# Altium PCB SevenSegment.PcbDoc
Units mm, origin at the board's own origin, x right, y up, seen from the top; angles counter-clockwise.
Board outline 50 x 35 mm, 2 copper layers (Top Layer, Bottom Layer); 50 components, 54 nets, 134 pads, 0 vias.
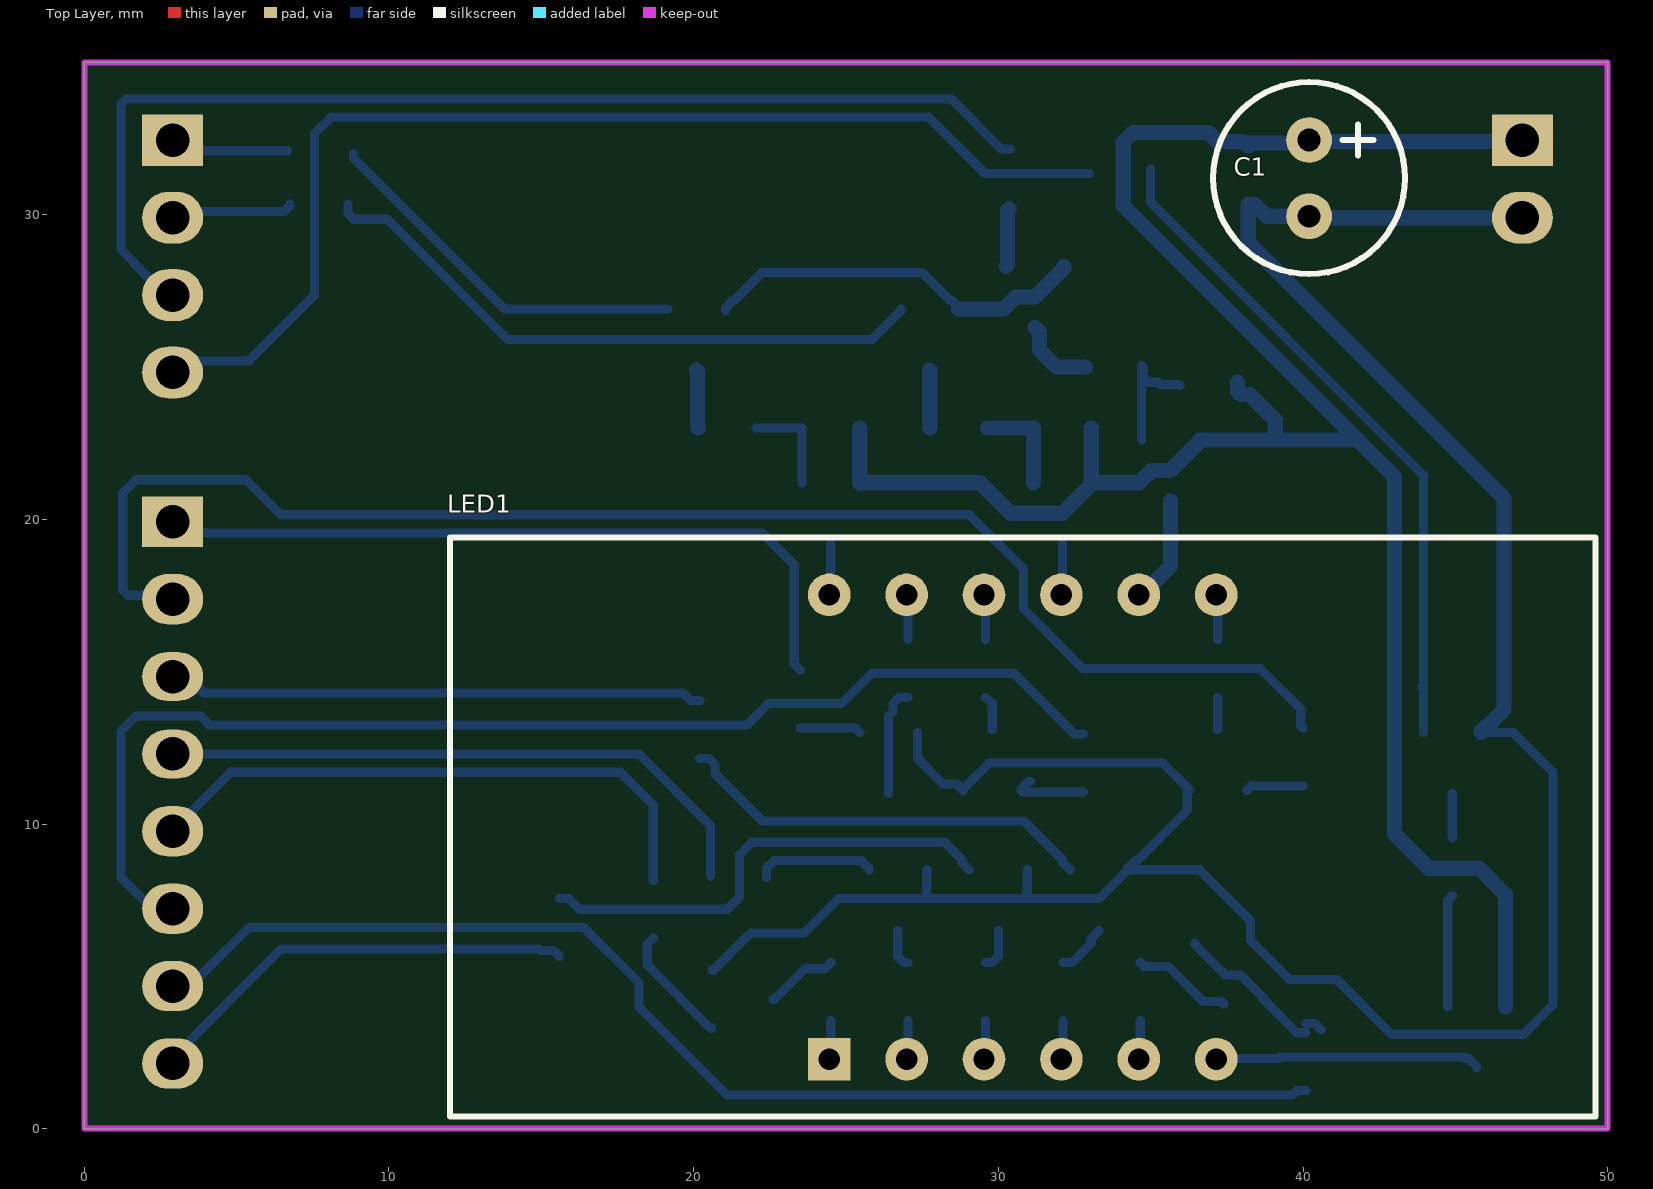
[diagram p0: Top Layer view]
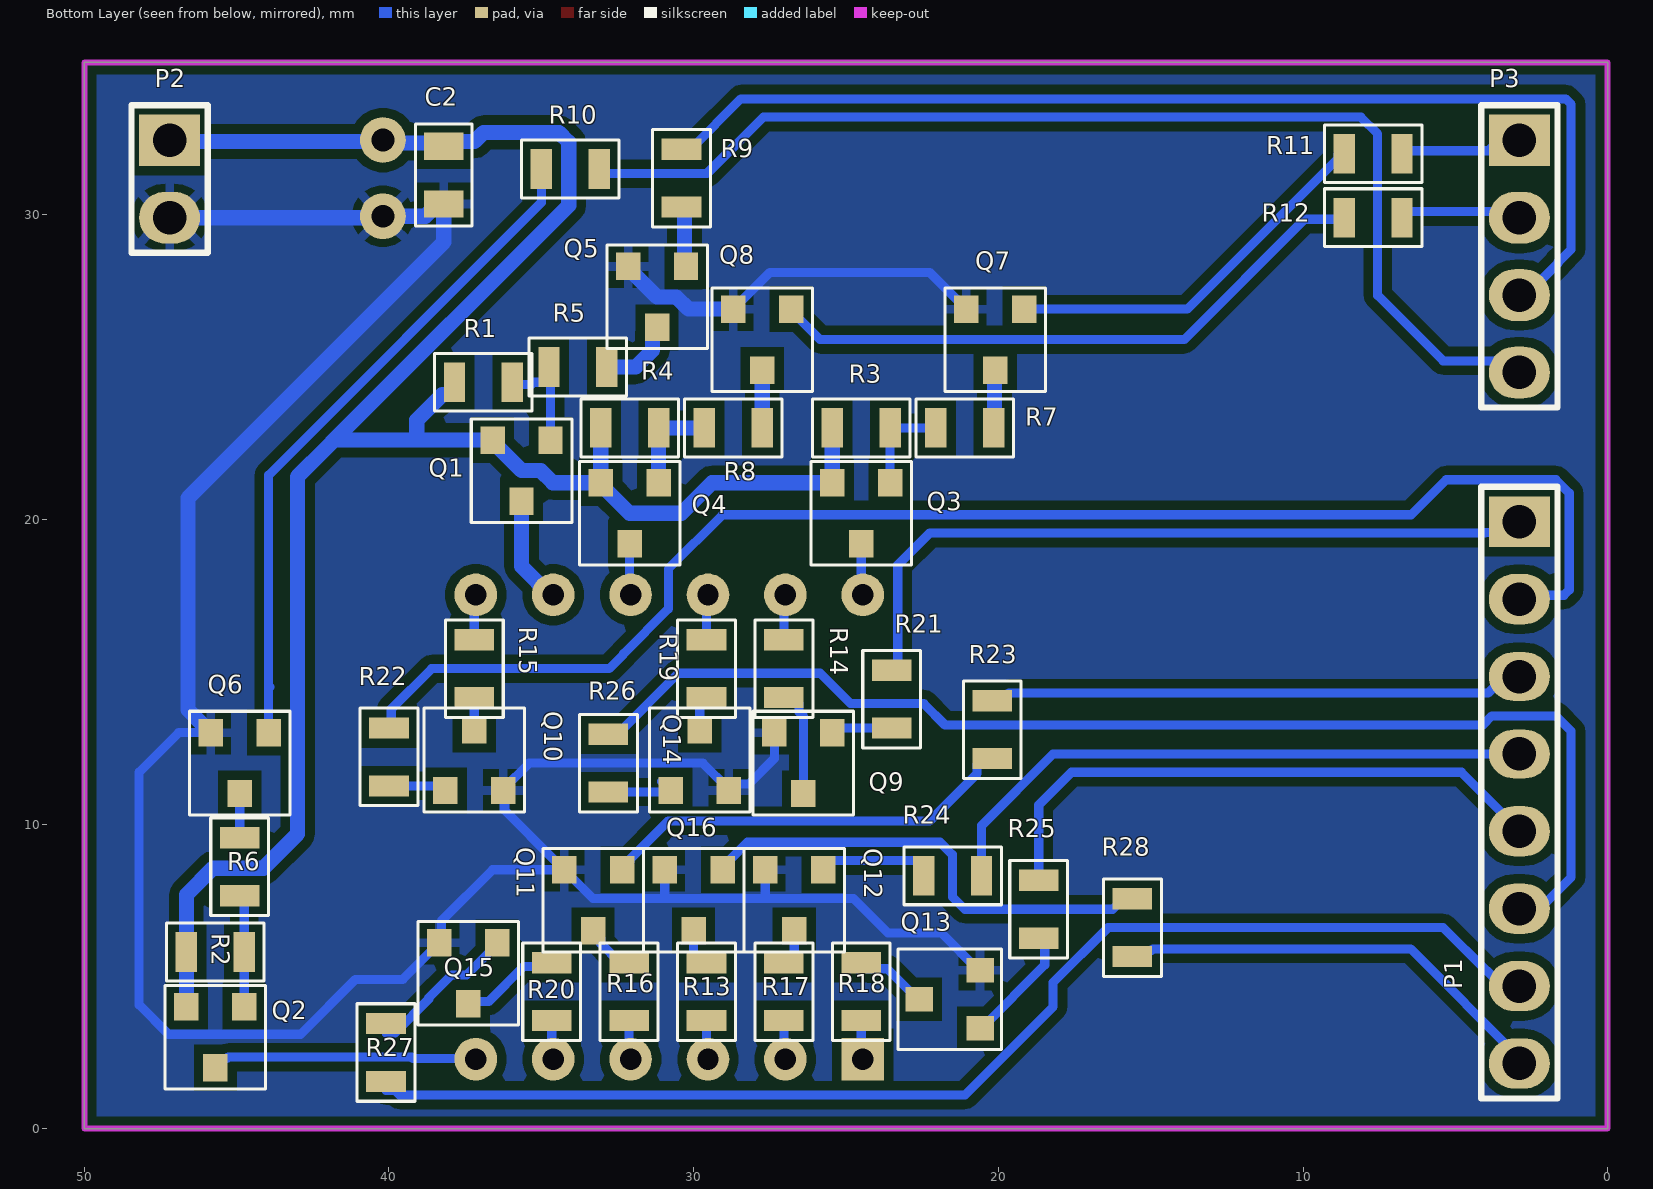
[diagram p1: Bottom Layer view, seen from below]
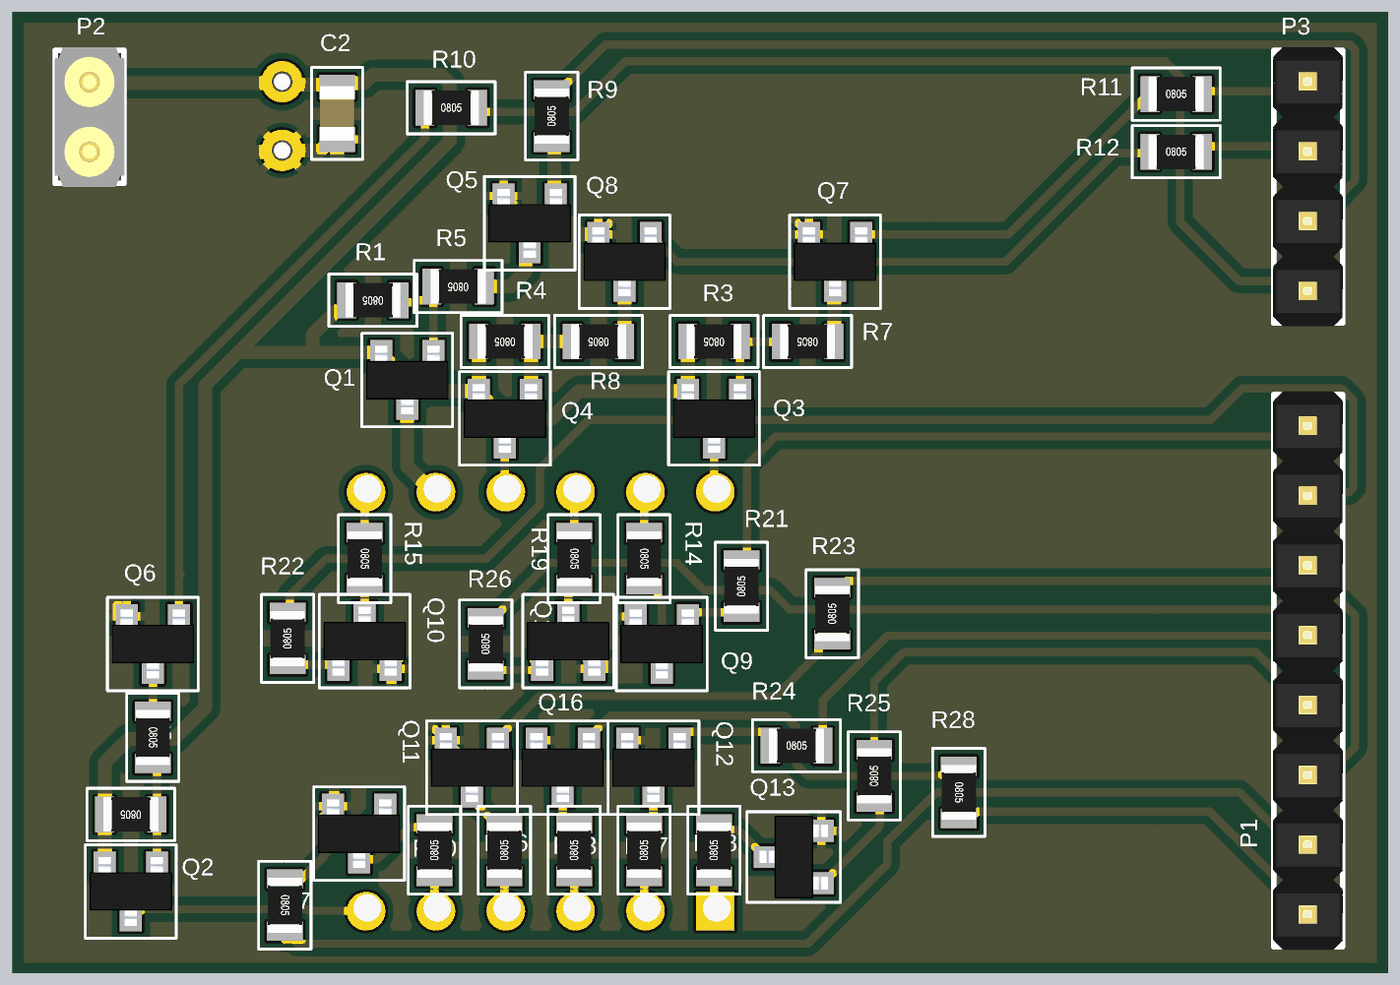
[diagram p2: 3D render of the assembled board from below, using the file's embedded part models]

## Layer stack, top to bottom
Top Solder: solder mask 0.0102, Solder Resist, Dk 3.5
Top Layer: signal copper 0.0356
Dielectric 1: dielectric 0.32, FR-4, Dk 4.8
Bottom Layer: signal copper 0.0356
Bottom Solder: solder mask 0.0102, Solder Resist, Dk 3.5

## Board outline
0,0 0,35 50,35 50,0

## Design rules (kind name [scope] priority, off if disabled: settings)
Clearance [All] p1: gap=0.3 ignorepadtopadclearanceinfootprint=FALSE
HoleSize [All] p1: absolutevalues=TRUE maxlimit=4 minlimit=0.025 maxpercent=80.000 minpercent=20.000
MinimumAnnularRing [All] p1: minimumring=0.2
PolygonConnect [All] p1: connectstyle=Relief reliefconductorwidth=0.3 reliefentries=4 polygonreliefangle="90 Angle" conductorbypadedge=TRUE mindistance=0.381 enablemindistance=FALSE airgapwidth=0.254
RoutingLayers [All] p1: top layer_v5=FALSE bottom layer_v5=TRUE
RoutingVias [All] p1: holewidth=0.711 width=1.27 viastyle="Through Hole" minholewidth=0.3 minwidth=0.8 maxholewidth=0.711 maxwidth=1.27
SolderMaskExpansion [All] p1: expansion=0.102 istentingtop=FALSE
SupplyNets "Schematic Supply Nets_1" [InNet('GND')] p1: voltage=0.000
SupplyNets "Schematic Supply Nets" [InNet('VCC')] p2: voltage=0.000
UnRoutedNet [All] p1: checkbadconnections=TRUE
Width [All] p1: maxlimit=0.5 minlimit=0.2 preferedwidth=0.254 minimp=50.000000 maximp=50.000000 favimp=50.000000
27 further rules are at their usual default settings.

## Components (designator, comment, footprint, x,y, rotation, side; value= is the part's Value field where it differs from the comment)
C1 "100uF/25V" 100UF/25V 40.2,31.2 r270 top
C2 "100nF/50V/0805" "CAPACITOR 0805" 38.2,31.3 r90 bottom
LED1 "sevensegment-3 or 4 digit" 5631BS-7SEG 30.8,9.9 r0 top
P1 "XH_8PIN" "PIN-HEADER 8*1" 2.9,11.03 r270 bottom
P2 "XH_2PIN" "pin-header 2*1" 47.2,31.17 r270 bottom
P3 "XH_4PIN" "PIN-HEADER 4*1" 2.9,28.63 r270 bottom
Q1 "BC807-40" SOT23 35.65,21.6 r0 bottom
Q2 "BC807-40" SOT23 45.7,3 r0 bottom
Q3 "BC807-40" SOT23 24.5,20.2 r0 bottom
Q4 "BC807-40" SOT23 32.1,20.2 r0 bottom
Q5 "BC847B" SOT23 31.2,27.3 r0 bottom
Q6 "BC847B" SOT23 44.9,12 r0 bottom
Q7 "BC847B" SOT23 20.1,25.9 r0 bottom
Q8 "BC847B" SOT23 27.75,25.9 r0 bottom
Q9 "BC847B" SOT23 26.4,12 r0 bottom
Q10 "BC847B" SOT23 37.2,12.1 r180 bottom
Q11 "BC847B" SOT23 33.3,7.5 r0 bottom
Q12 "BC847B" SOT23 26.7,7.5 r0 bottom
Q13 "BC847B" SOT23 21.6,4.25 r90 bottom
Q14 "BC847B" SOT23 29.8,12.1 r180 bottom
Q15 "BC847B" SOT23 37.4,5.1 r0 bottom
Q16 "BC847B" SOT23 30,7.5 r0 bottom
R1 "47k/0805" "RESISTOR 0805" 36.9,24.5 r0 bottom
R2 "47k/0805" "RESISTOR 0805" 45.7,5.8 r0 bottom
R3 "47k/0805" "RESISTOR 0805" 24.5,23 r0 bottom
R4 "47k/0805" "RESISTOR 0805" 32.1,23 r0 bottom
R5 "24k/0805" "RESISTOR 0805" 33.8,25 r0 bottom
R6 "24k/0805" "RESISTOR 0805" 44.9,8.6 r270 bottom
R7 "24k/0805" "RESISTOR 0805" 21.1,23 r0 bottom
R8 "24k/0805" "RESISTOR 0805" 28.7,23 r0 bottom
R9 "24k/0805" "RESISTOR 0805" 30.4,31.2 r90 bottom
R10 "24k/0805" "RESISTOR 0805" 34.05,31.5 r180 bottom
R11 "24k/0805" "RESISTOR 0805" 7.7,32 r180 bottom
R12 "24k/0805" "RESISTOR 0805" 7.7,29.9 r180 bottom
R13 "1k/0805" "RESISTOR 0805" 29.58,4.5 r90 bottom
R14 "1k/0805" "RESISTOR 0805" 27.04,15.1 r270 bottom
R15 "1k/0805" "RESISTOR 0805" 37.2,15.1 r270 bottom
R16 "1k/0805" "RESISTOR 0805" 32.12,4.5 r90 bottom
R17 "1k/0805" "RESISTOR 0805" 27.04,4.5 r90 bottom
R18 "1k/0805" "RESISTOR 0805" 24.5,4.5 r90 bottom
R19 "1k/0805" "RESISTOR 0805" 29.58,15.1 r270 bottom
R20 "1k/0805" "RESISTOR 0805" 34.66,4.5 r90 bottom
R21 "24k/0805" "RESISTOR 0805" 23.5,14.1 r90 bottom
R22 "24k/0805" "RESISTOR 0805" 40,12.2 r90 bottom
R23 "24k/0805" "RESISTOR 0805" 20.2,13.1 r90 bottom
R24 "24k/0805" "RESISTOR 0805" 21.5,8.3 r180 bottom
R25 "24k/0805" "RESISTOR 0805" 18.675,7.2 r90 bottom
R26 "24k/0805" "RESISTOR 0805" 32.8,12 r90 bottom
R27 "24k/0805" "RESISTOR 0805" 40.1,2.5 r270 bottom
R28 "24k/0805" "RESISTOR 0805" 15.6,6.6 r270 bottom

## Footprints (in the part's own frame and the unit in brackets; to place one, negate y for a bottom-side part, rotate by r counter-clockwise, add the part's x,y. Pads: shape width x height; smd on the part's side, far side on the other; paste and mask are expansions set on the pad)
100UF/25V [mm]
  round 1.5 hole 0.75: 1(-1.25,0) 2(1.25,0)
  silkscreen extent -3.15,-3.15 3.15,3.15, body extent -3.15,-3.15 3.15,3.15, height 8
5631BS-7SEG [mm]
  rect 1.4x1.4 hole 0.7: 1(-6.35,-7.62)
  round 1.4 hole 0.7: 2(-3.81,-7.62) 3(-1.27,-7.62) 4(1.27,-7.62) 5(3.81,-7.62) 6(6.35,-7.62) 7(6.35,7.62) 8(3.81,7.62) 9(1.27,7.62) 10(-1.27,7.62) 11(-3.81,7.62) 12(-6.35,7.62)
  silkscreen extent -18.8,-9.5 18.8,9.5, body extent -18.8,-9.5 18.8,9.5, height 8
"CAPACITOR 0805" [mm]
  rect 0.9x1.3 smd: 1(-0.95,0) 2(0.95,0)
  silkscreen extent -1.67,-0.92 1.68,0.92, body extent -1,-0.63 1,0.63, height 1
"pin-header 2*1" [mm]
  rect 1.7x2 hole 1.1: 1(-1.27,0)
  oval 1.7x2 hole 1.1: 2(1.27,0)
  silkscreen extent -2.42,-1.25 2.42,1.25, body extent -2.54,-1.28 2.54,1.26, height 7.85
"PIN-HEADER 4*1" [mm]
  rect 1.7x2 hole 1.1: 1(-3.81,0)
  oval 1.7x2 hole 1.1: 2(-1.27,0) 3(1.27,0) 4(3.81,0)
  silkscreen extent -4.96,-1.25 4.96,1.25, body extent -5.08,-1.27 5.08,1.27, height 9.2
"PIN-HEADER 8*1" [mm]
  rect 1.65x2 hole 1.1: 1(-8.89,0)
  oval 1.65x2 hole 1.1: 2(-6.35,0) 5(1.27,0) 6(3.81,0) 7(6.35,0) 8(8.89,0)
  oval 1.6x2 hole 1.1: 3(-3.81,0) 4(-1.27,0)
  silkscreen extent -10.04,-1.25 10.04,1.25, body extent -10.16,-1.27 10.16,1.27, height 9.2
"RESISTOR 0805" [mm]
  rect 0.7x1.3 smd: 1(-0.95,0) 2(0.95,0)
  silkscreen extent -1.6,-0.95 1.6,0.95, body extent -1,-0.63 1,0.63, height 0.5
SOT23 [mm]
  rect 0.8x0.9 smd: 1(-0.95,-1) 2(0.95,-1) 3(0,1)
  silkscreen extent -1.65,-1.7 1.65,1.7, body extent -1.5,-1.25 1.5,1.25, height 1.05

## Part data
C1: library part Capacitor-pol
C2: library part capacitor
P1: library part "header 8pin"
P2: library part "header 2pin"
P3: library part "header 4pin"
Q1 Q2 Q3 Q4: library part bjt-pnp
Q5 Q6 Q7 Q8 Q9 Q10 Q11 Q12 Q13 Q14 Q15 Q16: library part bjt-npn
R1 R2 R3 R4 R5 R6 R7 R8 R9 R10 R11 R12 R13 R14 R15 R16 R17 R18 R19 R20 R21 R22 R23 R24 R25 R26 R27 R28: library part resistor

## Nets (pads, with @x,y where several pads share a name; then routed paths per layer and width w, separated by ;. In a path a pad name is that pad's centre, name@x,y a point inside that pad or via, vN(x,y) a via of type N, cw(c..) or ccw(c..) an arc to the next point about the centre after c; other vN are vias at no path point)
A: P1.1 R21.2 | length 24.5
  Bottom Layer w0.3: P1.1@2.9,19.8 3.13,19.57 4.005,19.57 4.026,19.55 22.25,19.55 23.3,18.5 23.3,15.25 R21.2
B: P1.2 R22.2 | length 48
  Bottom Layer w0.3: P1.2@2.5,17.3 2.293,17.507 1.436,17.507 1.26,17.683 1.26,20.86 1.7,21.3 5.3,21.3 6.45,20.15 29.05,20.15 30.828,18.372 30.828,17.065 32.3,15.594 32.3,15.576 32.776,15.1 38.6,15.1 39.926,13.774 39.926,13.224 R22.2
C: P1.3 R23.2 | length 18
  Bottom Layer w0.3: P1.3@2.5,14.8 3.426,14.8 3.926,14.3 19.65,14.3 19.9,14.05 R23.2
D: P1.4 R24.2 | length 20.7
  Bottom Layer w0.3: P1.4@2.5,12.3 18.2,12.3 20.55,9.95 R24.2
D1: LED1.12 Q3.3 | length 1.8
  Bottom Layer w0.3: LED1.12@24.5,17.4 Q3.3
D2: LED1.9 Q4.3 | length 1.8
  Bottom Layer w0.3: Q4.3 32.11,19.19 32.11,17.41 LED1.9@32.12,17.4
D3: LED1.8 Q1.3 | length 3.6
  Top Layer w0.3: LED1.8@34.655,17.405 LED1.8@34.66,17.4
  Bottom Layer w0.5: LED1.8@34.66,17.4 34.66,17.471 35.65,18.461 Q1.3
D4: LED1.6 Q2.3 | length 8.8
  Bottom Layer w0.3: LED1.6@37.2,2.16 37.34,2.3 39.214,2.3 39.264,2.35 45.274,2.35 45.324,2.3 45.45,2.3 45.7,2.05 Q2.3
DIG1: P3.1 R11.2 | length 4.1
  Bottom Layer w0.3: P3.1@2.8,32.6 3.426,32.6 3.926,32.1 R11.2@6.662,32.1
DIG2: P3.2 R12.2 | length 4.1
  Bottom Layer w0.3: P3.2@2.8,30.1 6.55,30.1 6.75,30.3 R12.2@6.75,30.348
DIG3: P3.3 R9.2 | length 36.4
  Bottom Layer w0.3: P3.3@2.36,27.7 2.335,27.7 1.636,28.398 1.636,28.424 1.2,28.86 1.2,33.624 1.376,33.8 28.45,33.8 30.1,32.15 R9.2
DIG4: P3.4 R10.2 | length 37.8
  Bottom Layer w0.3: P3.4@2.36,25.2 5.4,25.2 7.55,27.35 7.55,32.65 8.1,33.2 27.714,33.2 29.564,31.35 R10.2@32.986,31.35
DP: P1.8 R28.2 | length 14.3
  Bottom Layer w0.3: P1.8@2.869,2.3 6.469,5.9 14.924,5.9 14.974,5.85 15.4,5.85 R28.2
E: P1.5 R25.2 | length 19.5
  Bottom Layer w0.3: P1.5@2.9,9.8 4.8,11.7 17.6,11.7 18.675,10.625 R25.2
F: P1.6 R26.2 | length 40
  Bottom Layer w0.3: P1.6@2.5,7.3 2.15,7.3 1.2,8.25 1.2,13.047 1.703,13.55 3.8,13.55 4.1,13.25 21.75,13.25 22.45,13.95 24.85,13.95 25.85,14.95 30.5,14.95 32.5,12.95 R26.2
G: P1.7 R27.2 | length 41.2
  Bottom Layer w0.3: P1.7@2.5,4.8 3.575,4.8 3.948,5.174 3.974,5.174 5.4,6.6 16.4,6.6 18.2,4.8 18.2,4 21.1,1.1 39.65,1.1 39.8,1.25 R27.2@40.1,1.25
GND: C1.2 C2.1 P2.2 Q5.2 Q6.2 Q7.2 Q8.2 Q9.2 Q10.2 Q11.2 Q12.2 Q13.2 Q14.2 Q15.2 Q16.2 | length 101.7
  Bottom Layer w0.3: Q13.2 20.65,5.2 21.875,6.425 23.625,6.425 24.75,7.55 27.65,7.55 ; Q7.2@21.05,26.85 Q7.2 21.05,26.95 21.3,27.2 21.35,27.2 22.25,28.1 27.5,28.1 28.4,27.2 28.45,27.2 Q8.2@28.7,26.95 ; Q9.2 27.35,12.15 28.182,11.318 28.632,11.318 Q14.2 28.85,11.15 29.7,12 35.4,12 36.25,11.15 Q10.2 36.2,11.05 36.2,10.45 34.55,8.8 34.5,8.8 Q11.2@34.25,8.55 ; Q12.2 27.65,7.55 ; Q16.2 30.95,7.55 ; Q6.2 46,13 46.9,13 48.2,11.7 48.2,4.064 47.236,3.1 42.9,3.1 41.1,4.9 39.55,4.9 Q15.2 38.276,6.174 38.276,6.824 36.6,8.5 Q11.2 33.3,7.55 30.95,7.55 ; 27.65,7.55 30.95,7.55
  Bottom Layer w0.5: Q8.2 30.172,26.9 30.572,27.3 31.2,27.3 32.15,28.25 Q5.2 ; C2.1 38.2,29.1 46.6,20.7 46.6,13.75 46.05,13.2 46,13.2 45.85,13.05 Q6.2 ; C2.1@38.4,30.35 38.8,29.95 C1.2 40.25,29.9 47.15,29.9 P2.2@47.2,29.85
LEGA: LED1.11 R14.1 | length 1.4
  Bottom Layer w0.3: R14.1 LED1.11@27.04,17.4
LEGB: LED1.7 R15.1 | length 1.4
  Bottom Layer w0.3: R15.1 LED1.7@37.2,17.4
LEGC: LED1.4 R16.1 | length 1.4
  Bottom Layer w0.3: LED1.4@32.12,2.16 R16.1
LEGD: LED1.2 R17.1 | length 1.4
  Bottom Layer w0.3: LED1.2@27.04,2.16 R17.1
LEGDP: LED1.3 R13.1 | length 1.4
  Bottom Layer w0.3: LED1.3@29.58,2.16 R13.1
LEGE: LED1.1 R18.1 | length 1.4
  Bottom Layer w0.3: LED1.1@24.5,2.16 R18.1
LEGF: LED1.10 R19.1 | length 1.4
  Bottom Layer w0.3: R19.1 LED1.10@29.58,17.4
LEGG: LED1.5 R20.1 | length 1.4
  Bottom Layer w0.3: LED1.5@34.66,2.16 R20.1
NetQ1_1: Q1.1 R1.1 R5.2 | length 4.1
  Bottom Layer w0.3: Q1.1 R5.2@34.7,25.05 ; R5.2 34.75,24.7 34.95,24.5 35.25,24.5 35.326,24.424 35.941,24.424 R1.1@35.965,24.4
NetQ2_1: Q2.1 R2.1 R6.2 | length 3.7
  Bottom Layer w0.3: Q2.1 R2.1 44.75,7.5 R6.2
NetQ3_1: Q3.1 R3.1 R7.2 | length 3.3
  Bottom Layer w0.3: R7.2 R3.1 Q3.1
NetQ4_1: Q4.1 R4.1 R8.2 | length 3.3
  Bottom Layer w0.5: R8.2 R4.1 Q4.1
NetQ5_1: Q5.1 R9.1 | length 1.9
  Bottom Layer w0.5: Q5.1 30.3,28.35 30.3,30.15 R9.1@30.35,30.2
NetQ5_3: Q5.3 R5.1 | length 2.5
  Bottom Layer w0.5: Q5.3 31.35,26.15 31.35,25.55 31.9,25 R5.1
NetQ6_1: Q6.1 R10.1 | length 22.3
  Bottom Layer w0.3: R10.1 35,30.4 43.95,21.45 43.95,14.5 Q6.1 ; 43.9,14.5 43.95,14.45
NetQ6_3: Q6.3 R6.1 | length 1.4
  Bottom Layer w0.3: R6.1 Q6.3
NetQ7_1: Q7.1 R11.1 | length 12.5
  Bottom Layer w0.3: R11.1@8.843,32 8.843,31.857 13.8,26.9 Q7.1
NetQ7_3: Q7.3 R7.1 | length 1.9
  Bottom Layer w0.5: Q7.3 20.125,24.875 20.125,23.025 R7.1
NetQ8_1: Q8.1 R12.1 | length 20.6
  Bottom Layer w0.3: R12.1@8.65,30.348 8.65,30.048 8.85,29.848 9.952,29.848 13.9,25.9 25.85,25.9 26.8,26.85 Q8.1
NetQ8_3: Q8.3 R8.1 | length 1.9
  Bottom Layer w0.5: R8.1 Q8.3
NetQ9_1: Q9.1 R21.1 | length 2
  Bottom Layer w0.3: R21.1 25.3,13.15 Q9.1
NetQ9_3: Q9.3 R14.2 | length 3.6
  Bottom Layer w0.3: Q9.3 26.4,13.536 26.54,13.676 26.54,13.95 26.74,14.15 R14.2
NetQ10_1: Q10.1 R22.1 | length 1.9
  Bottom Layer w0.3: Q10.1 38.3,11.25 R22.1
NetQ10_3: Q10.3 R15.2 | length 1
  Bottom Layer w0.3: Q10.3 R15.2
NetQ11_1: Q11.1 R23.1 | length 13.9
  Bottom Layer w0.3: R23.1 20.5,12.15 20.7,11.95 20.7,11.65 22.25,10.1 30.836,10.1 32.1,8.836 32.1,8.75 Q11.1
NetQ11_3: Q11.3 R16.2 | length 1.7
  Bottom Layer w0.3: R16.2 32.42,5.45 33.05,6.08 33.05,6.25 Q11.3
NetQ12_1: Q12.1 R24.1 | length 3.9
  Bottom Layer w0.3: R24.1@22.392,8.242 22.392,8.542 22.65,8.8 25.5,8.8 25.75,8.55 Q12.1
NetQ12_3: Q12.3 R17.2 | length 1.3
  Bottom Layer w0.3: Q12.3 26.7,5.65 26.9,5.45 R17.2
NetQ13_1: Q13.1 R25.1 | length 3.9
  Bottom Layer w0.3: R25.1 18.475,6.05 18.475,5.375 20.55,3.3 Q13.1
NetQ13_3: Q13.3 R18.2 | length 2.4
  Bottom Layer w0.3: Q13.3 22.65,4.25 23.65,5.25 24.3,5.25 R18.2
NetQ14_1: Q14.1 R26.1 | length 2.5
  Bottom Layer w0.3: Q14.1@31.05,11.4 31,11.4 30.75,11.15 Q14.1 30.8,11.05 R26.1
NetQ14_3: Q14.3 R19.2 | length 1.2
  Bottom Layer w0.3: R19.2 29.6,14.15 29.8,13.95 Q14.3
NetQ15_1: Q15.1 R27.1 | length 5.5
  Bottom Layer w0.3: Q15.1 36.45,6.05 37.453,5.047 37.94,5.047 38.693,4.293 38.693,4.257 39.8,3.15 R27.1@40.1,3.15 ; R27.1 40.4,3.45 R27.1@40.6,3.25
NetQ15_3: Q15.3 R20.2 | length 3.3
  Bottom Layer w0.3: R20.2 34.783,5.327 35.573,5.327 36.726,4.174 37.326,4.174 Q15.3
NetQ16_1: Q16.1 R28.1 | length 15.7
  Bottom Layer w0.3: R28.1 15.9,7.55 16.25,7.2 21.1,7.2 21.507,7.607 21.507,8.993 21.914,9.4 22.114,9.4 28.236,9.4 28.8,8.836 28.8,8.75 Q16.1
NetQ16_3: Q16.3 R13.2 | length 1.4
  Bottom Layer w0.3: R13.2 29.8,5.45 30,5.65 Q16.3
VCC: C1.1 C2.2 P2.1 Q1.2 Q2.2 Q3.2 Q4.2 R1.2 R2.2 R3.2 R4.2 | length 72
  Bottom Layer w0.5: R3.2 Q3.2 29.4,21.2 30.4,20.2 32.1,20.2 33.05,21.15 Q4.2 ; R4.2 Q4.2 ; Q1.2 36.6,22.55 35.65,21.6 35.022,21.6 34.622,21.2 Q4.2 ; Q1.2@36.75,22.6 37.75,22.6 39.088,22.6 ; R1.2 37.85,24.2 37.95,24.1 38.25,24.1 39.088,23.262 39.088,22.6 ; C2.2 C2.2@38.1,32.35 ; Q2.2 R2.2 46.65,7.678 45.778,8.55 44.122,8.55 43,9.672 43,21.4 42,22.4 41.8,22.6 ; P2.1@47.2,32.35 47.15,32.4 40.25,32.4 C1.1 40.1,32.35 C2.2@38.1,32.35 ; C2.2@38.1,32.35 38.045,32.405 37.195,32.405 36.9,32.7 34.422,32.7 34.1,32.378 34.1,30.3 41.8,22.6 ; 39.088,22.6 41.8,22.6

## Polygon pours and split planes (outlines as drawn)
GND on Bottom Layer "GND_L02_P002" (solid, remove dead copper, pour order 2): 36.5,35 50,35 50,0 0,0 0,35

## Keep-outs
Keep-Out Layer:
  the board outline again, w0.2